# Altium PCB 220VAC to 48V.PcbDoc
Units mil, origin at the board's own origin, x right, y up, seen from the top; angles counter-clockwise.
Board outline 2900 x 6640 mil, 2 copper layers (Top Layer, Bottom Layer); 54 components, 34 nets, 134 pads, 0 vias.
Unrouted connection lines stored in the file: 95.
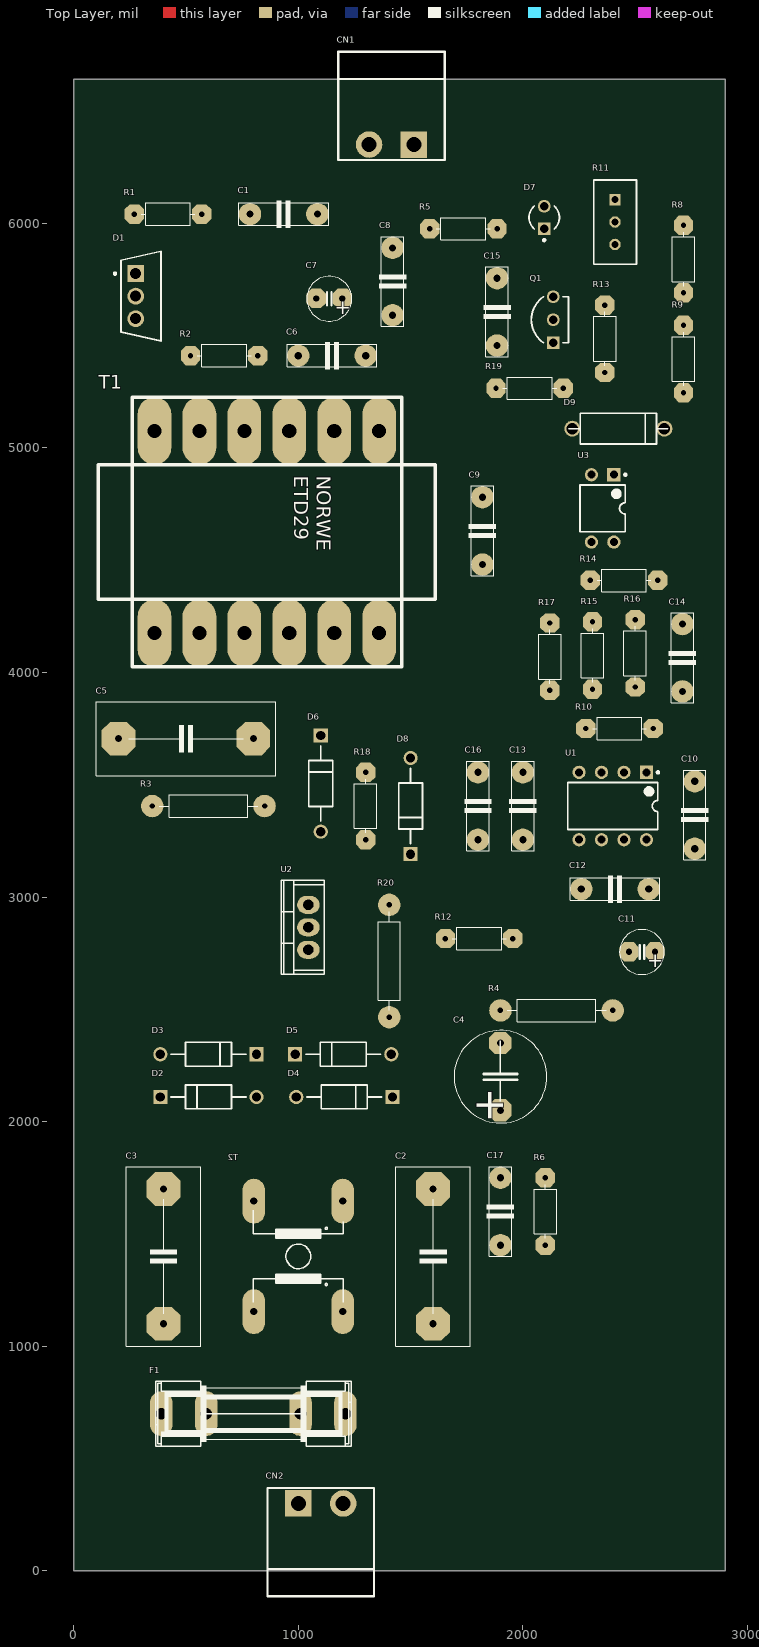
[diagram p0: Top Layer view]
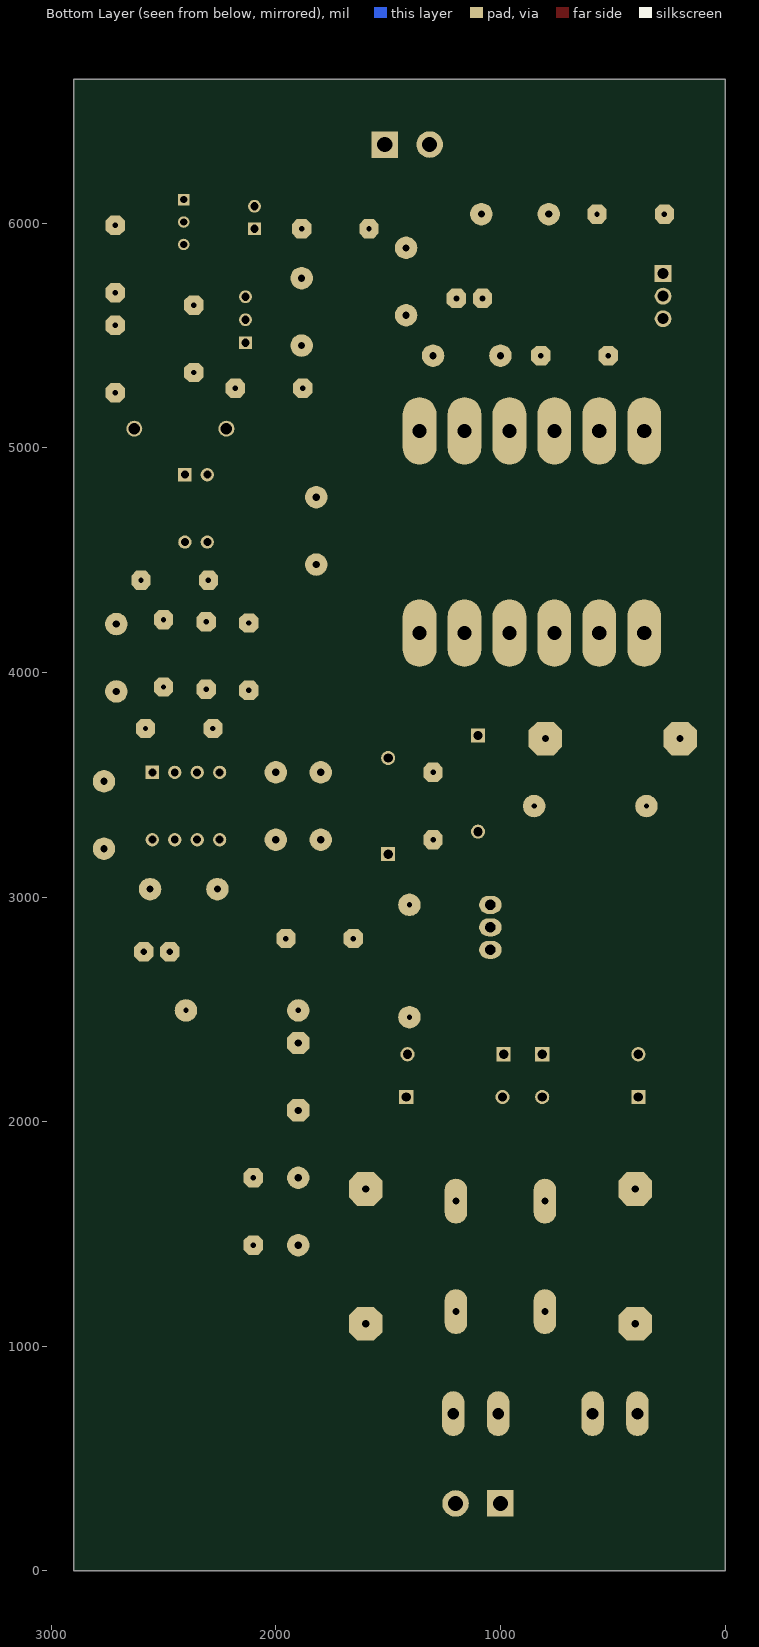
[diagram p1: Bottom Layer view, seen from below]

## Layer stack, top to bottom
Top Solder: solder mask 0.4, Solder Resist, Dk 3.5
Top Layer: signal copper 1.4
Dielectric 1: dielectric 12.6, FR-4, Dk 4.8
Bottom Layer: signal copper 1.4
Bottom Solder: solder mask 0.4, Solder Resist, Dk 3.5

## Board outline
0,0 2900,0 2900,6640 0,6640

## Design rules (kind name [scope] priority, off if disabled: settings)
Clearance [All] p1: gap=10 ignorepadtopadclearanceinfootprint=FALSE
PolygonConnect [All] p1: connectstyle=Relief reliefconductorwidth=10 reliefentries=4 polygonreliefangle="90 Angle" airgapwidth=10
RoutingVias [All] p1: holewidth=20 width=40 viastyle="Through Hole" minholewidth=20 minwidth=30 maxholewidth=30 maxwidth=50
SolderMaskExpansion [All] p1: expansion=4 istentingtop=FALSE
Width [All] p1: maxlimit=70 minlimit=50 preferedwidth=50 minimp=50.000000 maximp=50.000000 favimp=50.000000
30 further rules are at their usual default settings.

## Components (designator, comment, footprint, x,y, rotation, side; value= is the part's Value field where it differs from the comment)
C1 "104" C-1 935,6040 r0 top
C2 "104/275" C-15 1600,1400 r270 top
C3 "104/275" C-15 400,1400 r270 top
C4 "100/450" C5B2.5 1900,2200 r270 top
C5 "104/275" C-15 500,3705 r0 top
C6 "104" C-1 1150,5410 r0 top
C7 "100/25" C2.5-2 1138.05,5663.56 r0 top
C8 "104" C-1 1420,5740 r90 top
C9 "104" C-1 1820,4630 r90 top
C10 "104" C-1 2765,3365 r90 top
C11 "100/25" C2.5-2 2530,2755 r0 top
C12 "104" C-1 2410,3035 r180 top
C13 "104" C-1 2000,3405 r90 top
C14 "104" C-1 2710,4065 r90 top
C15 "104" C-1 1885,5605 r270 top
C16 "104" C-1 1800,3405 r270 top
C17 "104" C-1 1900,1600 r90 top
CN1 "WJ2EDGRC-5.08-2P" "Terminal Block P5.08-2P" 1659.76,6770.75 r180 top
CN2 "WJ2EDGRC-5.08-2P" "Terminal Block P5.08-2P" 855.24,-120.75 r0 top
D1 "MBR20100" FP-MBR20100CT-E3-4W-MFG 300,5675 r0 top
D2 "1N4007" FP-1N4007-MFG 600,2110 r0 top value=15pF
D3 "1N4007" FP-1N4007-MFG 600,2300 r180 top value=15pF
D4 "1N4007" FP-1N4007-MFG 1205,2110 r180 top value=15pF
D5 "1N4007" FP-1N4007-MFG 1200,2300 r0 top value=15pF
D6 "1N4007" FP-1N4007-MFG 1100,3505 r270 top value=15pF
D7 "LED" FP-HLMP-1719-MFG 2095,6025 r90 top
D8 "1N4007" FP-1N4007-MFG 1500,3405 r90 top value=15pF
D9 "Zener 12V" ONSC-SURMETIC40-2-017AA-01 2425,5085 r180 top
F1 "fuse" SHK20L 800,700 r0 top
Q1 "2N2222" FP-JAN2N2222A-MFG 2120,5570 r180 top
R1 "10 Ohm" R7-5 420,6040 r180 top
R2 "22 Ohm" R7-5 670,5410 r180 top
R3 "100K 1W" R-12,5 600,3405 r180 top
R4 "220K 2W" R-12,5 2150,2495 r0 top
R5 "47K" R7-5 1735,5975 r180 top
R6 "1M" R7-5 2100,1600 r90 top
R8 "22K" R7-5 2715,5840 r90 top
R9 "22K" R7-5 2715,5395 r90 top
R10 "8.2K" R7-5 2430,3750 r180 top
R11 "1k pot" BOUR-3296W-1-3 2410,6005 r270 top
R12 "10 ohm" R7-5 1805,2815 r180 top
R13 "2.2K" R7-5 2365,5485 r90 top
R14 "100K" R7-5 2450,4410 r0 top
R15 "12K" R7-5 2310,4075 r270 top
R16 "220K" R7-5 2500,4085 r270 top
R17 "1.8K" R7-5 2120,4070 r90 top
R18 "1K" R7-5 1300,3405 r270 top
R19 "100 Ohm" R7-5 2030,5265 r180 top
R20 "1 Ohm 1W" R-12,5 1405,2715 r270 top
T1 "Ideal Transformer With Central Tap" ST-D1 860,4675 r180 top
T2 "common mode choke" DFKH14 1000,1400 r180 top
U1 "UC3845N" P0008A 2400,3405 r270 top
U2 "K2645" TO-220-3_L10.5-W4.8-P2.54-L 1045,2865 r90 top
U3 "PC817" LTST-LTV-817-4 2355,4730 r270 top

## Footprints (in the part's own frame and the unit in brackets; to place one, negate y for a bottom-side part, rotate by r counter-clockwise, add the part's x,y. Pads: shape width x height; smd on the part's side, far side on the other; paste and mask are expansions set on the pad)
BOUR-3296W-1-3 [mm] "THD, 3-Leads, Body 9.53x4.83mm, Pitch 2.54mm"
  rect 1.3x1.3 hole 0.8: 1(-2.54,0)
  round 1.3 hole 0.8: 2(0,0) 3(2.54,0)
  silkscreen extent -4.76,-2.41 4.76,2.42, body extent -4.99,-2.58 4.99,2.58, height 0.25
C2.5-2 [mil] "C2.5-2"
  oct 86x86 / inner round 79.45 / far side oct 86x86 hole 27.56: 1(-58.05,1.44) 2(58.05,1.38)
  silkscreen extent -100,-100 100,100
C5B2.5 [mil] "C5B2.5"
  oct 100x100 / inner round 92.39 / far side oct 100x100 hole 31.5: 1(-150,0) 2(150,0)
  silkscreen extent -206,-206 206,206
C-1 [mil] "C-1"
  round 100 hole 32: 1(-150,0) 2(150,0)
  silkscreen extent -200,-60 200,60
C-15 [mil] "C-15"
  oct 150x150 / inner round 138.58 / far side oct 150x150 hole 32: 1(-300,0) 2(300,0)
  silkscreen extent -400,-165 400,165
DFKH14 [mil] "DFKH14"
  oval 100x200 hole 32: 1(-198,246) 2(198,246) 3(198,-246) 4(-198,-246)
  silkscreen extent -200,-205 200,205
FP-1N4007-MFG [mm]
  rect 1.6x1.6 hole 1.05 paste-2539.97 mask+0: 1(-5.438,0)
  round 1.6 hole 1.05 paste-2539.97 mask+0: 2(5.438,0)
  silkscreen extent -4.24,-1.35 4.24,1.35, body extent -6.34,-1.45 6.34,1.45, height 0.25
FP-HLMP-1719-MFG [mm]
  rect 1.45x1.45 hole 0.95 paste-2539.97 mask+0: 1(-1.27,0)
  round 1.45 hole 0.95 paste-2539.97 mask+0: 2(1.27,0)
  silkscreen extent -2.67,-1.71 1.3,1.71, body extent -2.22,-2.22 2.22,2.22, height 0.25
FP-JAN2N2222A-MFG [mm]
  rect 1.45x1.45 hole 0.95 paste-2539.97 mask+0: 1(-0.38,2.6)
  round 1.45 hole 0.95 paste-2539.97 mask+0: 2(-0.38,0) 3(-0.38,-2.6)
  silkscreen extent -2.09,-2.6 2.09,2.6, body extent -2.19,-3.42 2.19,3.42, height 0.25
FP-MBR20100CT-E3-4W-MFG [mm]
  rect 1.9x1.9 hole 1.25 paste-2539.97 mask+0: 1(-0.61,2.55)
  round 1.9 hole 1.25 paste-2539.97 mask+0: 2(-0.61,0) 3(-0.61,-2.55)
  silkscreen extent -3.07,-5.08 2.25,5.08, body extent -2.45,-5.37 2.45,5.37, height 0.25
LTST-LTV-817-4 [mm] "DIP, 4-Leads, Body 7x5.1mm, Pitch 2.54mm"
  rect 1.5x1.5 hole 0.9: 1(-3.81,1.27)
  round 1.5 hole 0.9: 2(-3.81,-1.27) 3(3.81,-1.27) 4(3.81,1.27)
  silkscreen extent -3.93,-2.55 2.65,2.7, body extent -3.95,-2.55 3.95,2.55, height 4.5
ONSC-SURMETIC40-2-017AA-01 [mm] "AXIAL, 2-Leads, Diameter 3.49mm"
  round 1.8 hole 1.3: 1(-5.207,0) 2(5.207,0)
  silkscreen extent -5.59,-1.75 5.59,1.75, body extent -5.93,-1.6 5.93,1.6, height 0.25
P0008A [mm] "DIP, 8-Leads, Body 10.15x6.6mm, Pitch 2.54mm"
  rect 1.5x1.5 hole 0.9: 1(-3.81,3.81)
  round 1.5 hole 0.9: 2(-3.81,1.27) 3(-3.81,-1.27) 4(-3.81,-3.81) 5(3.81,-3.81) 6(3.81,-1.27) 7(3.81,1.27) 8(3.81,3.81)
  silkscreen extent -3.93,-5.1 2.65,5.24, body extent -3.95,-5.07 3.95,5.07, height 5.08
R7-5 [mil] "R7-5"
  oct 86x86 / inner round 79.45 / far side oct 86x86 hole 24: 1(-150,0) 2(150,0)
  silkscreen extent -120,-50 120,50
R-12,5 [mil] "R-12,5"
  round 100 hole 24: 1(250,0) 2(-250,0)
  silkscreen extent -220,-50 220,50
SHK20L [mil] "SHK20L"
  oval 100x200 hole 52: 1A(-410,0) 1B(-210,0) 2A(410,0) 2B(210,0)
  silkscreen extent -435,-145 435,145
ST-D1 [mil] "ST-D1"
  oval 150x300 hole 63: 1(-500,-400) 2(-300,-400) 3(-100,-400) 4(100,-400) 5(300,-400) 6(500,-400) 7(500,500) 8(-300,500) 9(100,500) 10(-100,500) 11(300,500) 12(-500,500)
  silkscreen extent -750,-550 750,650
"Terminal Block P5.08-2P" [mm]
  rect 3x3 hole 1.7 paste-2539.97 mask+0.051: 1(3.677,10.687)
  round 3 hole 1.7 paste-2539.97 mask+0.051: 2(8.757,10.687)
  silkscreen extent 0.19,0.19 12.25,12.44, body extent 0.11,0.7 12.09,12.7, height 8.28
TO-220-3_L10.5-W4.8-P2.54-L [mil]
  oval 80x100 hole 45 slot 45.2 at 90 deg paste-99999 mask+2: 1(-100,0) 2(0,0) 3(100,0)
  silkscreen extent -210,-70 210,120, body extent -211,-96 211,96, height 10

## Part data
C1 C6 C8 C9 C10 C12 C13 C14 C15 C16 C17: library part "CAPACITOR 104"
C2 C3 C5: library part "CAPACITOR 104/275"
C4: library part "CAPACITOR 100/450"
C7 C11: library part "CAPACITOR 100/25"
CN1 CN2: Color=Green, JLCPCB Part Class="Extended Part", LCSC Part Name="5.08mm 1x2P 排数:1 每排P数:2", Manufacturer=KANGNEX(康奈克斯电气), Add into BOM=yes, Connector Type=板端/Receptacle-Close, Convert to PCB=yes, Datasheet=https://atta.szlcsc.com/upload/public/pdf/source/20191225/C3697_6E7B45CD3FD3DA2CDF6A2CE707235E10.pdf, Device=WJ2EDGRC-5.08-2P, Manufacturer Part=WJ2EDGRC-5.08-2P, Mounting Style=Bend, Number of Pins=2P, Number of PINs Per Row=2, Number of Rows=1, Pitch=5.08mm, Structure=1x2P, Supplier=LCSC, Supplier Footprint=弯插,P=5.08mm, Supplier Part=C3697, Symbol=WJ2EDGRC-5.08-2P
D1: library part CMP-00030-42878425-1, "MBR20100CT-E3/4W Dual Common-Cathode High-Voltage Schottky Rectifier", Average Rectified Current=10A, Case/Package=TO-220AB, Forward Current=20A, Forward Voltage=800mV, Max Forward Surge Current (Ifsm)=150A, Max Junction Temperature (Tj)=150°C, Max Repetitive Reverse Voltage (Vrrm)=100V, Max Reverse Leakage Current=100µA, Min Operating Temperature=-65°C, Element Configuration="Common Cathode", Height=15.3162mm, Lead Free="Lead Free", Length=10.5156mm, Max Operating Temperature=150°C, Max Reverse Voltage (DC)=100V, Max Surge Current=150A, Mount="Through Hole", NexarPartId=42878425, Number of Pins=3, Peak Non-Repetitive Surge Current=150A, Peak Reverse Current=100µA, Radiation Hardening=No, Reverse Voltage=100V, RoHS=Compliant, Schedule B="8541100080, 8541100080|8541100080, 8541100080|8541100080|8541100080, 8541100080|8541100080|8541100080|8541100080", Width=4.699mm
D2 D3 D4 D5 D6 D8: library part CMP-02540-000046-1, "DIODE GEN PURP 1KV 1A DO204AL", Capacitance=15pF, Forward Current=1A, Manufacturer=Vishay, Manufacturer Part Number=1N4007-E3/54, Max Junction Temp=+150°C, Max Repetitive Reverse Voltage=1000V, Max Surge Forward Current=30A, Peak Reverse Current=30uA, Temperature="-50°C to +150°C", Temperature Range Low=-50°C, Automotive=No, Category=Diode, ComponentLink2Description=Datasheet, ComponentLink2URL=http://www.vishay.com/docs/88503/1n4001.pdf, Device Class L1="Discrete Semiconductors", Device Class L2=Diodes, Device Class L3="Rectifier Diodes", Digikey Description="DIODE GEN PURP 1KV 1A DO204AL", Height=2.7mm, Ipc Land Pattern Name=DIOPA1088W105L520D270, Lead Free=Yes, Mouser Description="Rectifiers Vr/1000V Io/1A", Octopart=https://octopart.com/1n4007-e3%2F54-vishay-39548207, Package=1N4007, RoHS=TRUE, Temperature Range High=+150°C
D7: library part CMP-2000-06410-2, "IR LED SFH480", Colour=Yellow, Forward Current=2mA, Forward Voltage=1.8V, Manufacturer=Broadcom, Manufacturer Part Number=HLMP-1719, Package=0, Power Dissipation=17.5mW, Reverse Voltage=5V, Temperature="-40°C to +100°C", Temperature Range High=+100°C, Temperature Range Low=-40°C, Automotive=No, Category=Diode, ComponentLink2Description=Datasheet, ComponentLink2URL=https://docs.broadcom.com/docs/AV02-1557EN, Device Class L1=Optoelectronics, Device Class L2=LEDs, Device Class L3=unset, Digikey Description="LED YELLOW DIFFUSED T-1 T/H", Lead Free=Yes, Led Orientation=Straight, Luminous Intensity=2.1mcd, Mouser Description="Standard LEDs - Through Hole Yellow Diffused 585nm 2.1mcd", Octopart=https://octopart.com/hlmp-1719-broadcom-71130405, RoHS=TRUE, Viewing Angle=50°, Wavelength=880nm
D9: library part 1N4742A-TR, "Diode, Zener, Vr 12V, If 200mA, Pkg DO-41, Vf 1.2V, Tj +175C, Cs 380mA, Pd 1.3W, Ir 21mA", Breakdown Voltage=12V, Case/Package=DO-41, Forward Voltage=1.2V, Manufacturer=Vishay, Max Operating Temperature=175°C, Max Power Dissipation=1.3W, Max Reverse Current=5uA, Min Operating Temperature=-65°C, Supplier Part Number=1N4742AVSCT-ND, Test Current=21mA, Tolerance=5%, Category="Zener Diodes", ComponentLink1Description=https://datasheet.ciiva.com/27050/813394-27050166.pdf?src-supplier=Jameco, ComponentLink1URL=https://datasheet.ciiva.com/27050/813394-27050166.pdf?src-supplier=Jameco, ComponentLink2Description=https://datasheet.ciiva.com/18434/70061602-18434087.pdf?src-supplier=Allied+Electronics, ComponentLink2URL=https://datasheet.ciiva.com/18434/70061602-18434087.pdf?src-supplier=Allied+Electronics, ComponentLink3Description=https://datasheet.ciiva.com/26320/1n4728a-26320207.pdf?src-supplier=Element14, ComponentLink3URL=https://datasheet.ciiva.com/26320/1n4728a-26320207.pdf?src-supplier=Element14, Diameter=2.6mm, Height=2.6mm, Impedance=9R, Lead Free="Lead Free", Length=0.161inch, Manufacturer Part Number=1N4742A-TR, Max Reverse Leakage Current=5uA, Mounting Technology="Through Hole", Packaging="Cut Tape", Pins=2, Power Dissipation=1.3W, Pricing="1=0.36, 10=0.251, 100=0.1267, 500=0.10332, 1000=0.07666, 2000=0.0645 (USD)", Radiation Hardening=No, Reach SVHC Compliant=Unknown, RoHS=Yes, RoHS Compliant=Yes, Series="Automotive, AEC-Q101", Stock=55025, Supplier=Digikey, Voltage Tolerance=5%, Width=2.6mm, Working Voltage=12V, Zener Voltage=12V
Q1: library part CMP-06366-000013-1, "TRANS NPN 50V 0.8A TO218"
R1 R2 R5 R6 R8 R9 R10 R12 R13 R14 R15 R16 R17 R18 R19: library part "RESISTOR 1/4W"
R3 R4 R20: library part "RESISTOR 2W"
R11: library part CMP-1747-00002-1, "Square Trimpot(R) Trimming Potentiometer, 1000 Ohm, -55 to 125 degC, 3-Pin THD, RoHS, Tube", Case Code (Imperial)=0603, Case Code (Metric)=1608, Max Operating Temperature="155 degC", Min Operating Temperature="-55 degC", Package Quantity=5000, Power Rating="100 mW", Resistance="4.7 kohm", Tolerance=1%, Voltage Rating="75 V", Case\Package=0603, ComponentLink1Description="Manufacturer URL", ComponentLink1URL=http://www.bourns.com/, ComponentLink2Description=Datasheet, ComponentLink2URL=http://www.bourns.com/docs/Product-Datasheets/3296.pdf, DatasheetVersion=May-16, Height="0.45 mm", Length="1.6 mm", Mount="Surface Mount", PackageDescription="3-Pin Through Hole Device, Body 9.53 x 4.83 mm, Pitch 2.54 mm", PackageReference=3296W-1-3, Packaging="Tape and Reel", Pins=2, Radiation Hardening=No, REACH SVHC=Yes, RoHSCompliant=true, Weight="7.1E-05 oz", Width="0.8 mm"
T1: library part "Transformer With Central Tap Ideal_1", SimulationGenericComponent=True
T2: library part "Transformer With Central Tap Ideal", SimulationGenericComponent=True
U1: library part CMP-0319-00305-2, "PWM Controller with Current Control, 50 % Duty Cycle, 0 to +70 degC, 8-pin PDIP (P), Green (RoHS & no Sb/Br)", Frequency(Max)(kHz)=450, Manufacturer="Texas Instruments", Rating=Catalog, Code_JEDEC=MS-001-BA, ComponentLink1Description=Datasheet, ComponentLink1URL=http://www.ti.com/general/docs/lit/getliterature.tsp?genericPartNumber=UC3845&fileType=pdf, Control Method=Current, DatasheetVersion=SLUS223C, Duty Cycle(Max)(%)=50, Eco-Plan="Green (RoHS & no Sb/Br)", Mounting Technology="Through Hole", PackageDescription="8-Pin Plastic Dual-In-Line Package, Row Spacing 7.62 mm, Pitch 2.54 mm", PackageReference=P0008A, PackageVersion="revE, Apr-2010", PartNumber=UC3845N, Regulated Outputs(#)=1, SubFamily="PWM Controller", Topology="Boost, Buck, Flyback, Forward", UVLO Thresholds On/Off(V)=8.4/7.6
U2: library part 2SK2645-01MR-VB, Manufacturer=VBsemi(微碧半导体), Contributor=lcsc, Manufacturer Part=2SK2645-01MR-VB, spicePre=U, spiceSymbolName=2SK2645-01MR-VB, Supplier=LCSC, Supplier Part=C19190251
U3: library part CMP-2000-06632-1, "Photocoupuler, 50 mA Forward Current, 1.2 V Forward Voltage, -50 to 110 degC, 4-Pin DIP, RoHS, Tube", Manufacturer=Lite-On, Maximum Collector Current=50mA, Maximum Collector Emitter Saturation Voltage=200mV, Maximum Collector Emitter Voltage=35V, Maximum Current Transfer Ratio=600%, Maximum Forward Voltage=1.4V, Maximum Operating Temperature=100C, Maximum Power Dissipation=200mW, Maximum Reverse Voltage=6V, Minimum Current Transfer Ratio=50%, Minimum Isolation Voltage=5000Vrms, Minimum Operating Temperature=-30C, Package Description="4-Pin Double In-line Package, Body 6.5 x 4.6 mm, Pitch 2.54 mm", Package Reference=LTV-817, Supplier_Package=PDIP, Typical Forward Voltage=1.2V, Datasheet URL=http://optoelectronics.liteon.com/upload/download/DS70-2012-0050/S_110_LTV-8X7%20series%200915.pdf, Datasheet Version="Rev. E, 10/2015", Family=LTV817, Input Type=DC, Manufacturer URL=http://www.us.liteon.com/, Maximum Fall Time=18us, Maximum Input Current=50mA, Maximum Rise Time=18us, Mounting=ThroughHole, Mounting Technology=ThroughHole, Number of Channels per Chip=1, Output Device=Transistor, Output Type=DC, Pin_Count=4, Product Height=3.5mm, Product Length=4.6mm, Product Type=TransistorandPhotovoltaicOutputPhotoCouplers, Product Width=6.5mm, Typical Fall Time=3us, Typical Rise Time=4us

## Nets (pads, with @x,y where several pads share a name; then routed paths per layer and width w, separated by ;. In a path a pad name is that pad's centre, name@x,y a point inside that pad or via, vN(x,y) a via of type N, cw(c..) or ccw(c..) an arc to the next point about the centre after c; other vN are vias at no path point)
48V: C1.2 C7.1 C8.2 CN1.1 D1.2 R5.2 R8.2
"275V DC": C4.1 C5.1 D3.1 D5.1 R3.1 R4.2 T1.7
GND: C4.2 C6.2 C7.2 C8.1 C9.1 C9.2 C10.2 C11.2 C12.2 C13.1 C16.2 CN1.2 D2.2 D4.2 R11.3 R13.2 R17.1 R20.1 T1.1 T1.2 T1.8 U1.5
Live: CN2.1 F1.1A F1.1B
NetC1_1: C1.1 R1.1
NetC2_1: C2.1 F1.2A F1.2B T2.4
NetC2_2: C2.2 R6.1 T2.1
NetC3_1: C3.1 D2.1 D3.2 T2.3
NetC3_2: C3.2 D4.1 D5.2 T2.2
NetC5_2: C5.2 D6.1 R3.2
NetC6_1: C6.1 R2.1
NetC10_1: C10.1 R10.1 R14.2 U1.8 U3.4
NetC13_2: C13.2 R10.2 U1.4
NetC14_1: C14.1 R15.2 R16.2 U1.2
NetC14_2: C14.2 R16.1 U1.1
NetC15_1: C15.1 Q1.3 R11.2
NetC15_2: C15.2 R19.2
NetC16_1: C16.1 R18.1 U1.3
NetC17_2: C17.2 R6.2
NetD1_1: D1.1 D1.3 R1.2 T1.5 T1.6
NetD6_2: D6.2 T1.9 U2.2
NetD7_1: D7.1 R5.1
NetD7_2: D7.2 R11.1
NetD8_2: D8.2 T1.12
NetD9_1: D9.1 R9.1 U3.1
NetD9_2: D9.2 Q1.2 R13.1
NetQ1_1: Q1.1 R19.1 U3.2
NetR8_1: R8.1 R9.2
NetR12_1: R12.1 U1.6
NetR12_2: R12.2 U2.1
NetR14_1: R14.1 R15.1 R17.2 U3.3
NetR18_2: R18.2 R20.2 U2.3
Neutral: C17.1 CN2.2
VCC: C11.1 C12.1 D8.1 R4.1 U1.7
pads on no net: R2.2 T1.3 T1.4 T1.10 T1.11

## Text inside footprints (layer, text, board x,y; h text height)
C4: Top Overlay "+" at 1750,2150 h232.5 r270
C7: Top Overlay "+" at 1162.49,5573.11 h108.5
C11: Top Overlay "+" at 2554.44,2664.55 h108.5
T1: Top Overlay "NORWE" at 1060,4875 h108.5 r270; Top Overlay "ETD29" at 960,4875 h108.5 r270; Mechanical 7 "SMPS" at 560,4825 h155 r270